# Allegro board EVK_BaseBoard.brd
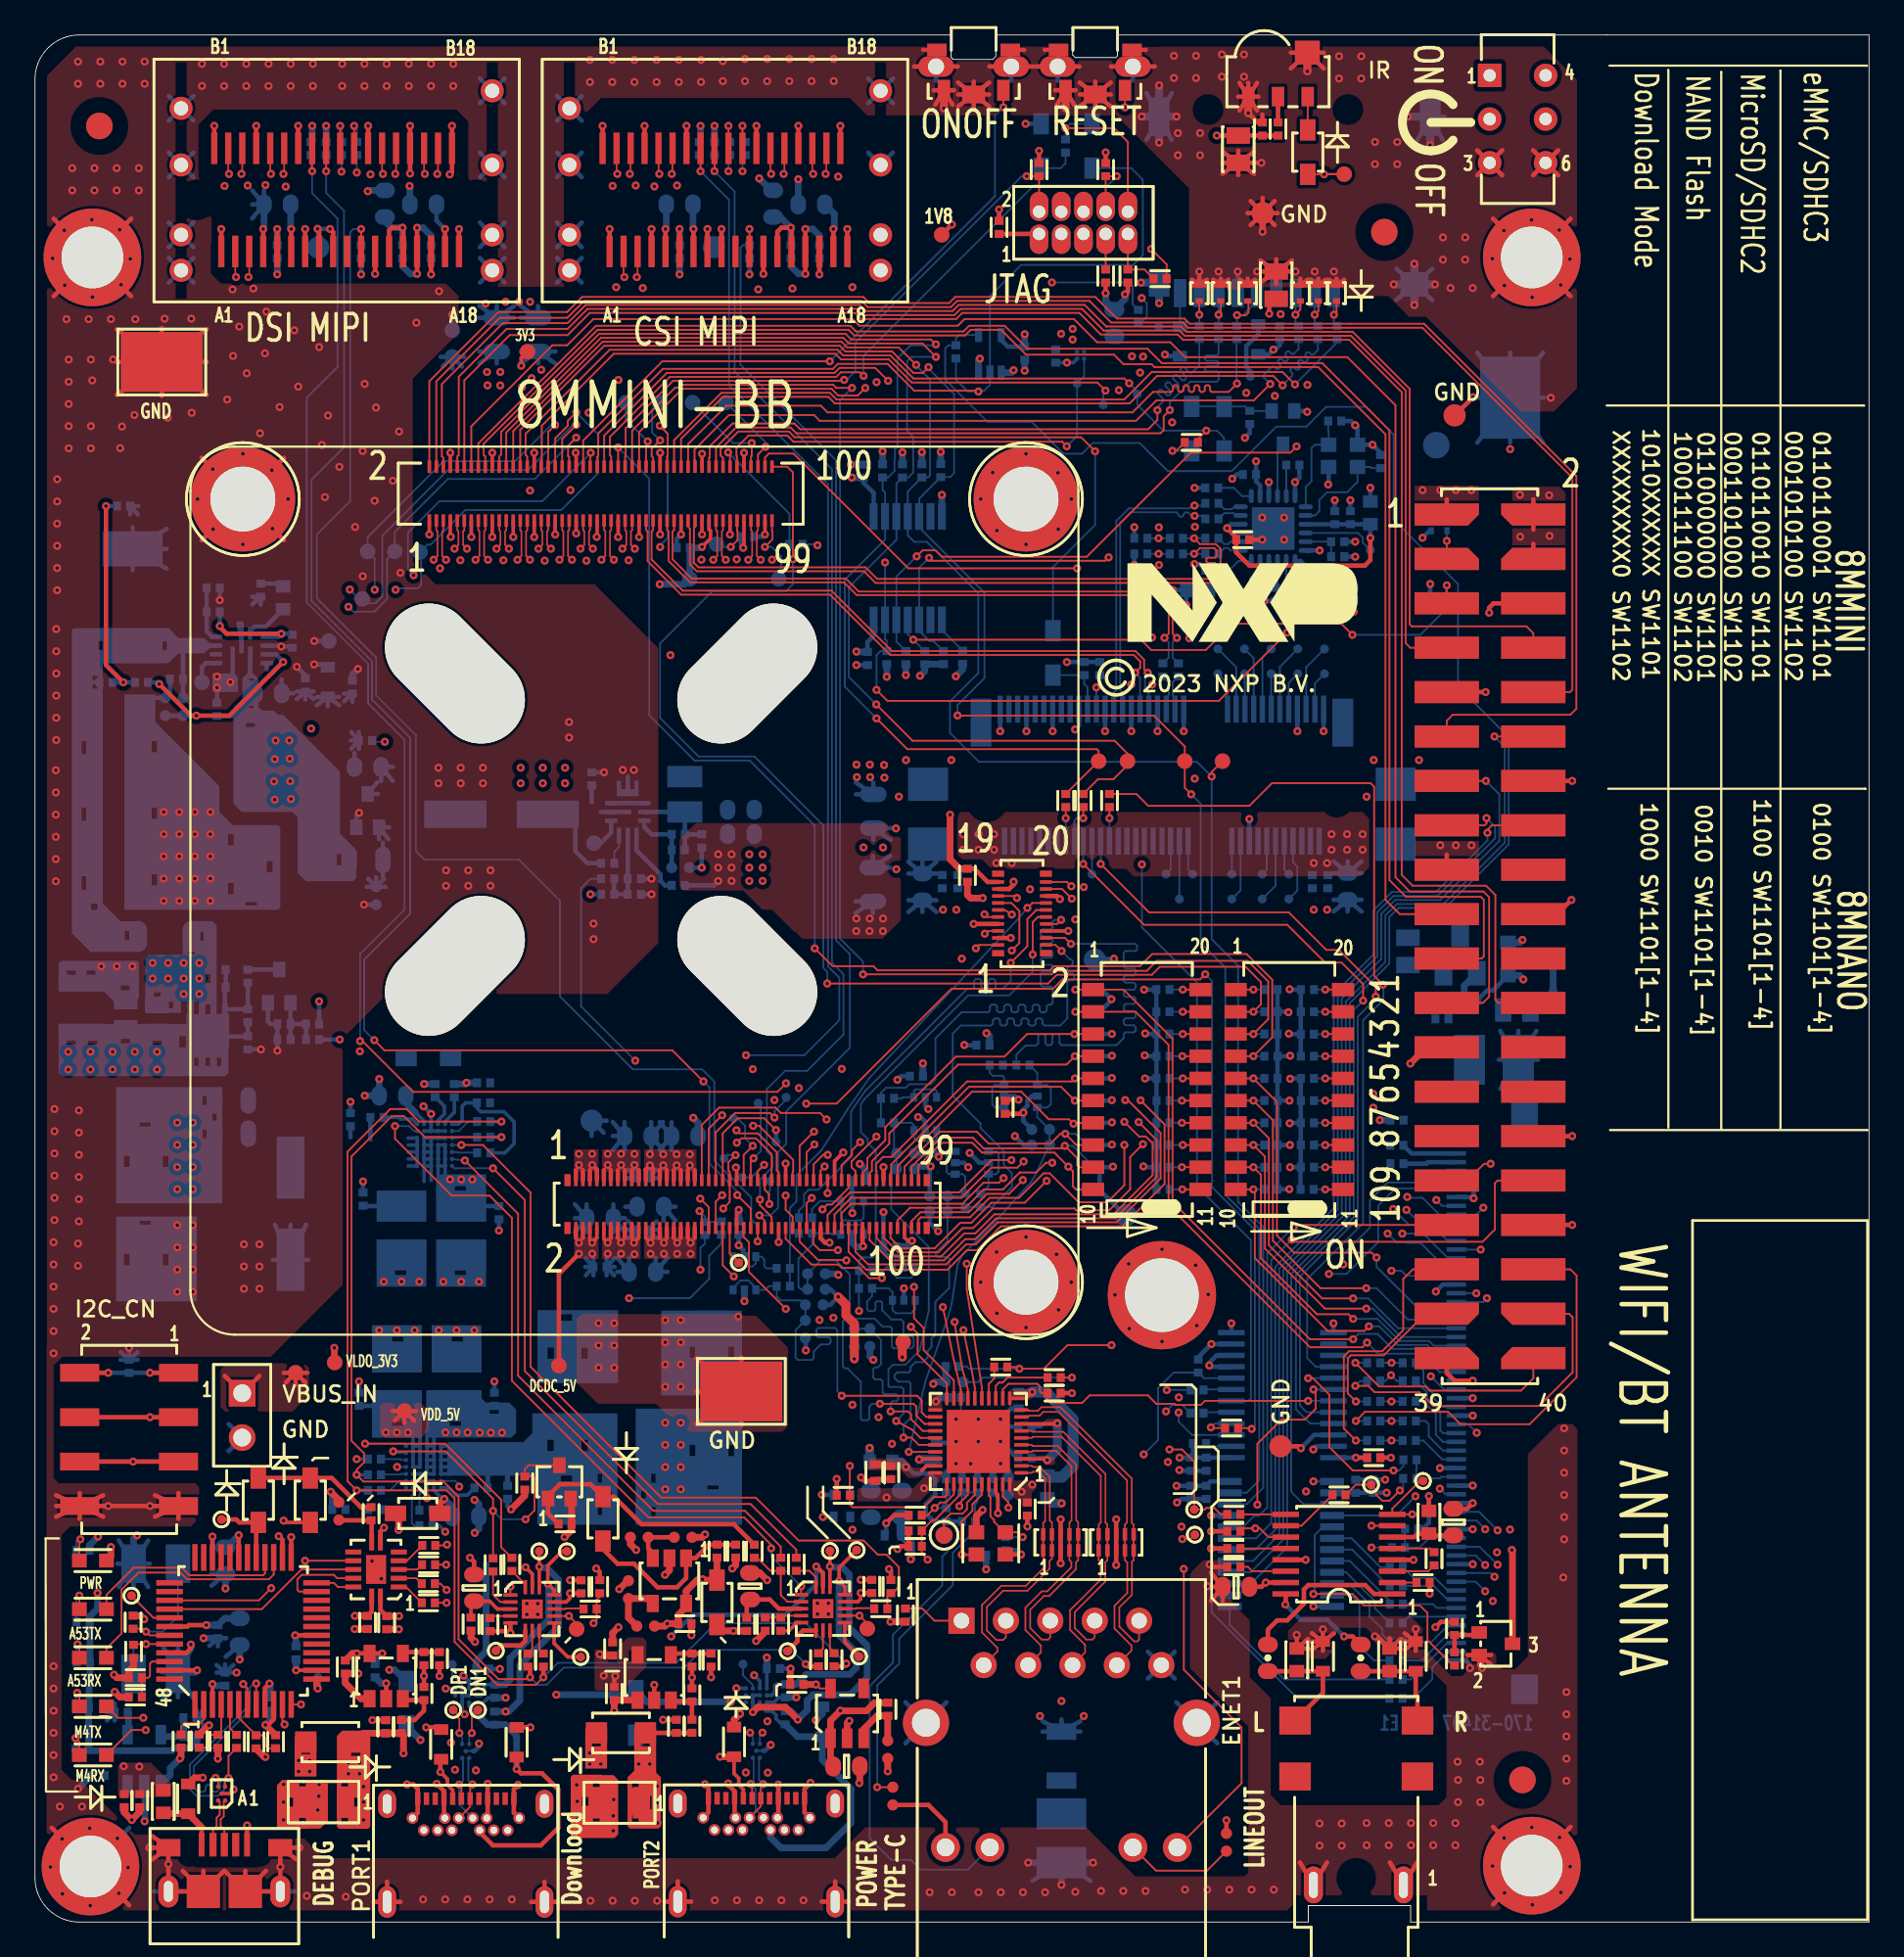
[diagram p0: board, top side]
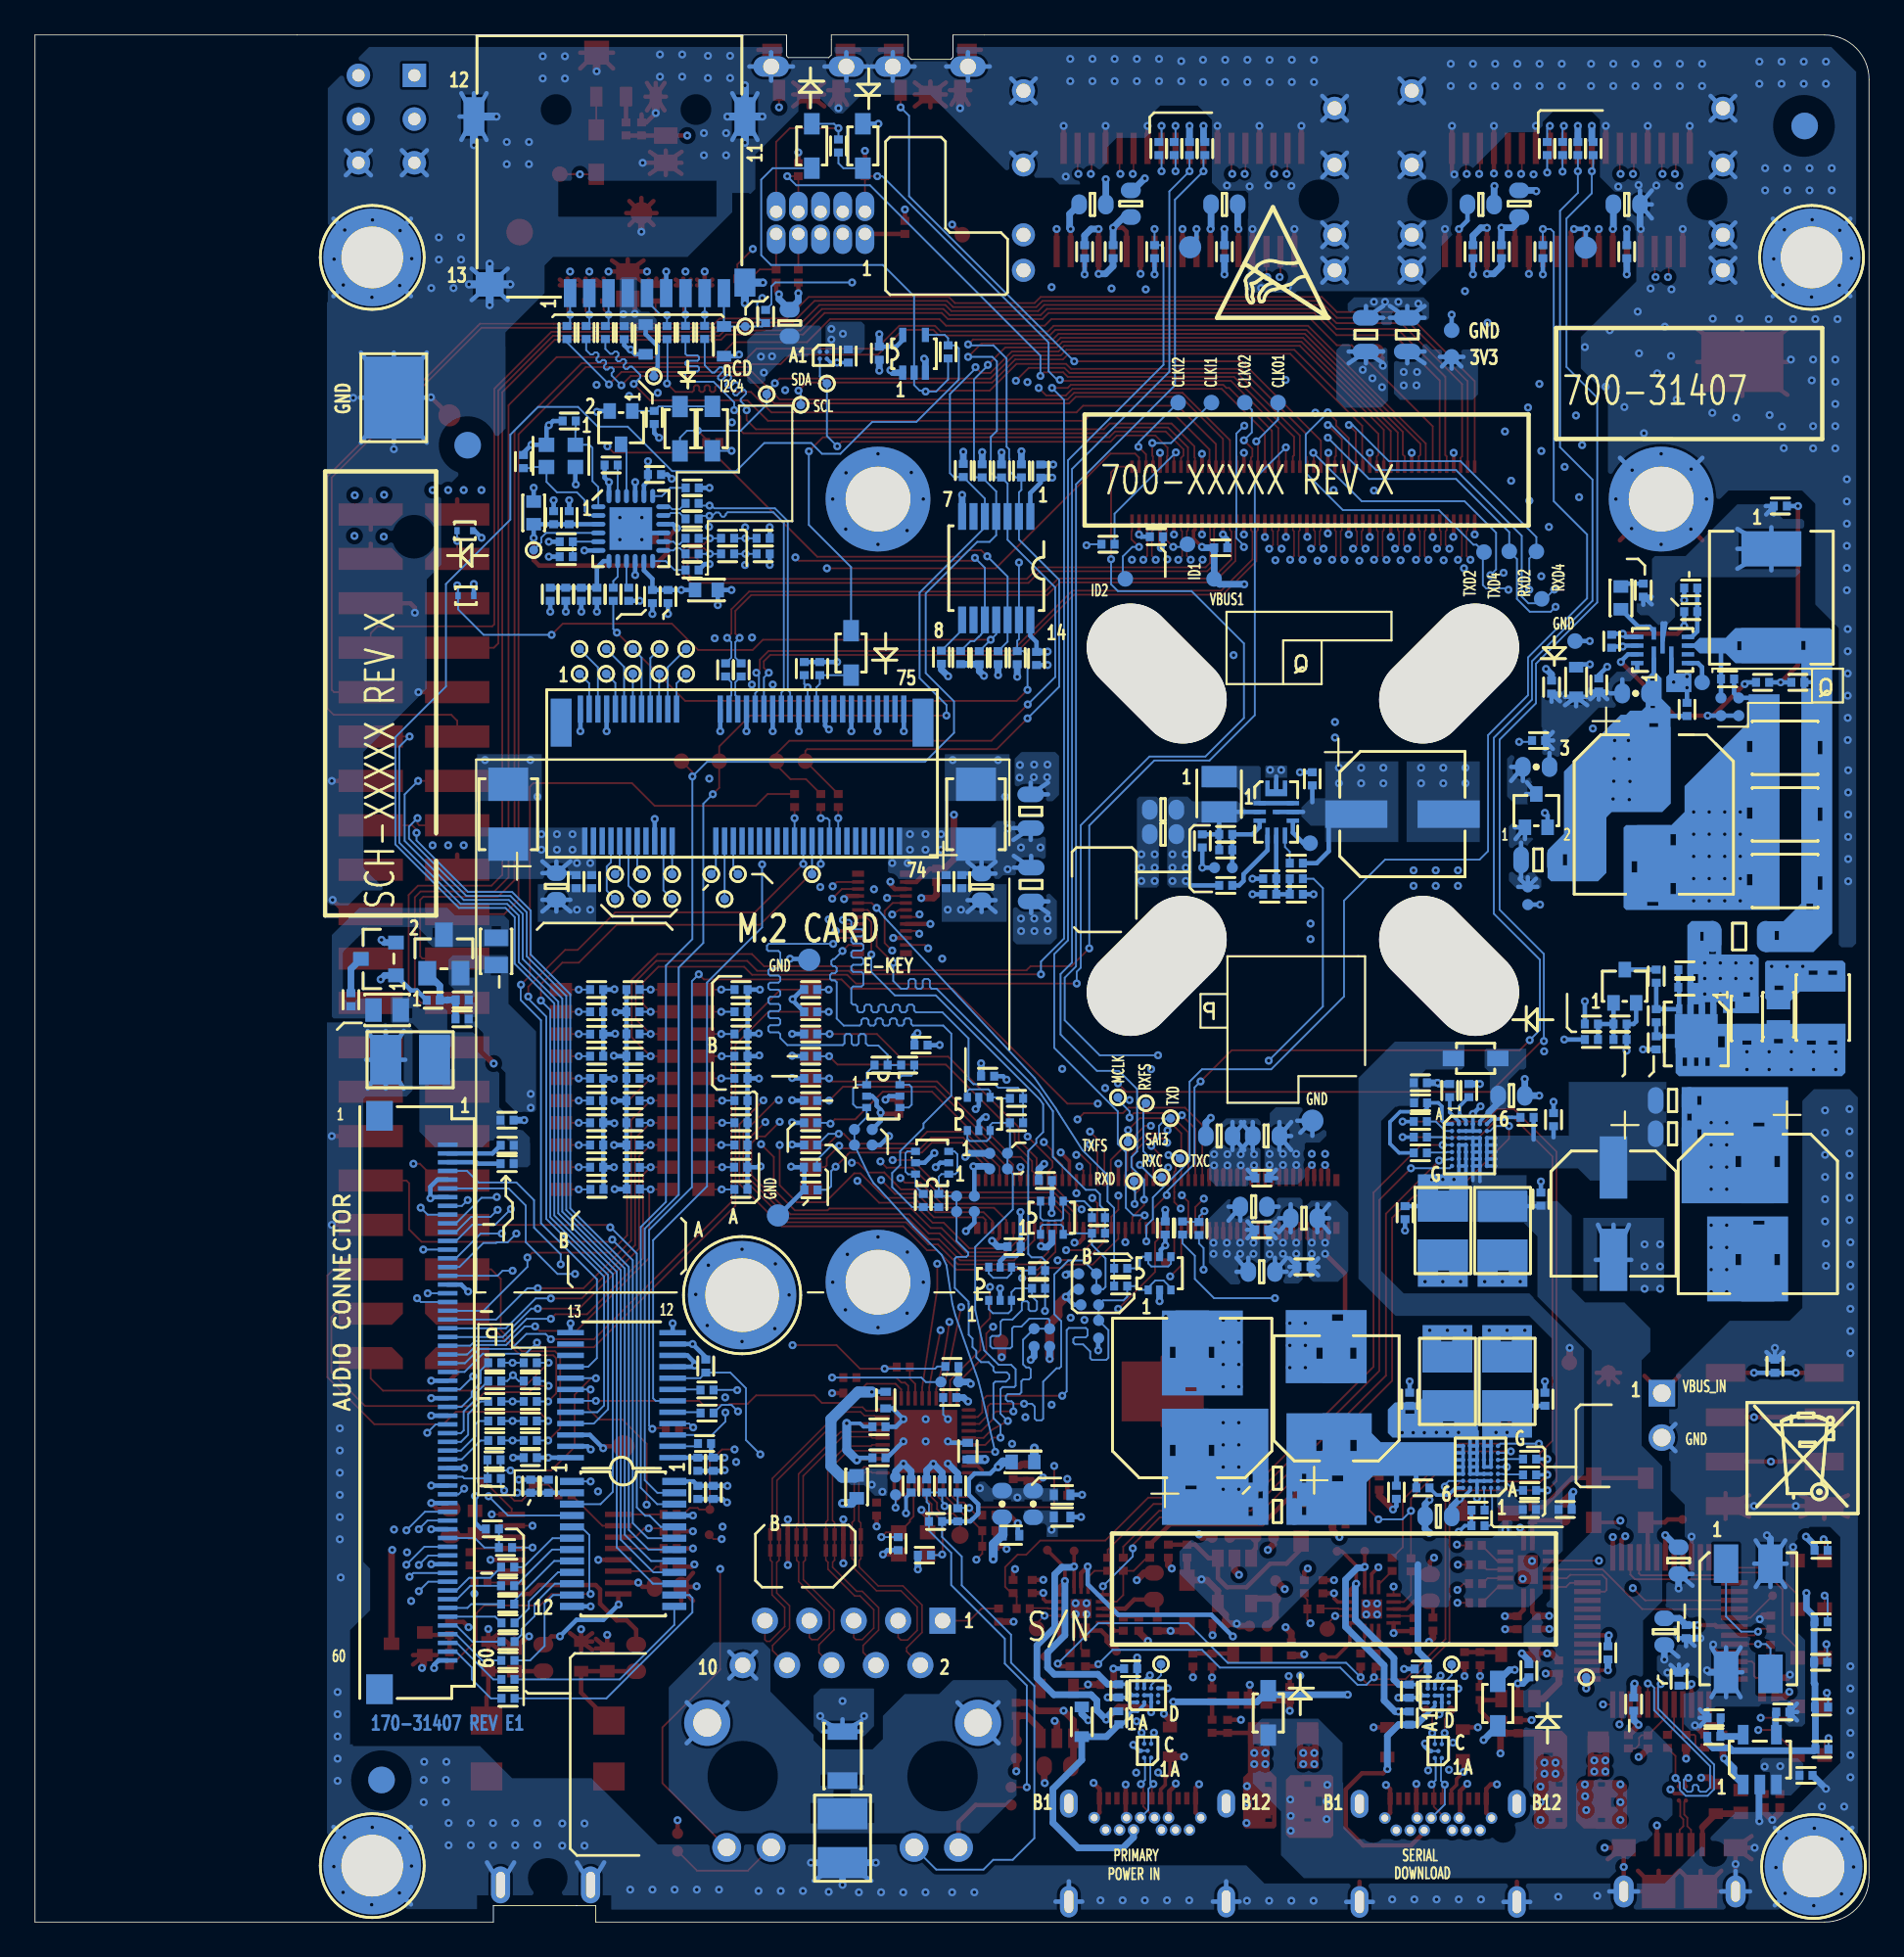
[diagram p1: board, bottom side, seen from below]

Outline 104.92 x 107.95 mm; copper layers: TOP, L2_GND_1, L3_INT_1, L4_PWR_1, L5_PWR_2, L6_INT_2, L7_GND_2, BOTTOM. Coordinates in mm from the lower left corner of the outline.
Outline path: 0,105.41 arc(0.74,107.21) 2.54,107.95 52.4,107.95 52.4,106.68 52.53,106.55 54.79,106.55 54.97,106.73 54.97,107.95 59.36,107.95 59.36,106.81 59.51,106.65 61.82,106.65 61.93,106.76 61.93,107.95 104.92,107.95 104.92,0 78.69,0 78.69,0.94 72.84,0.94 72.84,0 2.54,0 arc(0.74,0.74) 0,2.54 0,105.41

## Design rules (mm)
constraint set DEFAULT: min track width 0.102
net group 3483_EN_SNK1: nets 3483_EN_SNK1 EN_SNK1
net group 3483_EN_SNK2: nets 3483_EN_SNK2 EN_SNK2
net group CLS_DIFF_100: nets PCIE_CLKN PCIE_CLKP
net group CSI_I2C_SCL: nets CSI_I2C_SCL I2C3_SCL
net group CSI_I2C_SDA: nets CSI_I2C_SDA I2C3_SDA
net group DIFFPAIR0: nets USB_DBG_DM USB_DBG_DP
net group ECSPI1: nets UART3_CTS UART3_RTS
net group EN_SRC1: nets EN_SRC1 PD_EN_SRC1
net group EN_SRC2: nets EN_SRC2 PD_EN_SRC2
net group ENET_MDIO: nets ENET_MDIO MDIO
net group ENET_NRST_LV: nets ENET_NRST_LV N107724179
net group ETH_TRX0: nets ETH_TRX0_N ETH_TRX0_P
net group ETH_TRX1: nets ETH_TRX1_N ETH_TRX1_P
net group ETH_TRX2: nets ETH_TRX2_N ETH_TRX2_P
net group ETH_TRX3: nets ETH_TRX3_N ETH_TRX3_P
net group EXP_IO0: nets EXP_IO0 N104271923
net group EXP_IO1: nets EXP_IO1 N104271907
net group EXP_IO2: nets EXP_IO2 N104271909
net group EXP_IO3: nets EXP_IO3 N104271911
net group EXP_IO4: nets EXP_IO4 N104271896
net group EXP_IO5: nets EXP_IO5 N104271904
net group EXP_IO6: nets EXP_IO6 N104271893
net group EXP_IO7: nets EXP_IO7 N104271890
net group EXT_PWREN: nets EXT_PWREN N107626870
net group JTAG_NTRST: nets JTAG_NTRST N106685087
net group LED_LINK1000: nets LED2_CFGLDO1 LED_LINK1000
net group LINE_OUTL: nets LINE_OUTL N102887640
net group LINE_OUTR: nets LINE_OUTR N102887637
net group MDC: nets ENET_MDC MDC
net group N102889416: nets N102889416 N102889418
net group N106947509: nets N106947509 N106947511
net group N107060780: nets N106825388 N107060780
net group NRST: nets N106685043 NRST
net group PCIE_NRST_LV: nets N107724192 PCIE_NRST_LV
net group PCIE_RX: nets PCIE_RXN PCIE_RXP
net group PCIE_TXN: nets N105095143 PCIE_TXN
net group PCIE_TXP: nets N105095140 PCIE_TXP
net group PMIC_ON_REQ: nets N106947532 PMIC_ON_REQ
net group POR_B: nets EX_POR_B POR_B
net group REF_CLK_C: nets N101995404 N101995408
net group SAI2_MCLK: nets N107724212 SAI2_MCLK
net group SAI3_TXC: nets N102889754 SAI3_TXC
net group SAI5: nets SAI5_MCLK SAI5_RXFS
net group SD2_CLK: nets N98831920 SD2_CLK
net group SD2_CMD: nets N101118780 SD2_CMD
net group SD2_DATA0: nets N101118689 SD2_DATA0
net group SD2_DATA1: nets N101118681 SD2_DATA1
net group SD2_DATA3: nets N101118786 SD2_DATA3
net group SPDIF: nets SPDIF_RX SPDIF_TX
net group SPDIF_EXT_CLK: nets N104271750 SPDIF_EXT_CLK
net group UART: nets UART3_RXD UART3_TXD
net group UART2_RXD: nets N108373117 UART2_RXD
net group UART2_TXD: nets N108373115 UART2_TXD
net group UART4_RXD: nets N108373121 UART4_RXD
net group UART4_TXD: nets N108373119 UART4_TXD
net group USB1_CC1: nets USB1_CC1 USB1_CC1_CN
net group USB1_CC2: nets USB1_CC2 USB1_CC2_CN
net group USB1_D: nets USB1_DN USB1_DP
net group USB2_CC1: nets USB2_CC1 USB2_CC1_CN
net group USB2_CC2: nets USB2_CC2 USB2_CC2_CN
net group USB2_D: nets USB2_DN USB2_DP
net group USB_LD_NFLT1: nets LD1_NINT USB_LD_NFLT1
net group USB_LD_NFLT2: nets LD2_NINT USB_LD_NFLT2
net group VBUS_DBG: nets N108201307 VBUS_DBG
net group VBUS_EXT: nets N101800237 N104270741
net group CSI-DSI: nets CSI_CKN CSI_CKP CSI_DN0 CSI_DN1 CSI_DN2 CSI_DN3 CSI_DP0 CSI_DP1 CSI_DP2 CSI_DP3 DSI_CKN DSI_CKP DSI_DN0 DSI_DN1 DSI_DN2 DSI_DN3 DSI_DP0 DSI_DP1 DSI_DP2 DSI_DP3
net group DSI_TS_SCL: nets DSI_TS_SCL I2C2_SCL M2_I2C_SCL
net group DSI_TS_SDA: nets DSI_TS_SDA I2C2_SDA M2_I2C_SDA
net group ECSPI2: nets BT_DEV_WAKE N102026698 PCIE_NCLKREQ PCIE_NRST PCIE_NWAKE
net group ENET: nets N107968412 N107968479 N107968670 N107968707 N107968717 N107968739
net group I2C2_SDA_3V3: nets I2C2_SDA_3V3 LD1_I2C_SDA LD2_I2C_SDA N104279469 PD1_I2C_SDA PD2_I2C_SDA
net group LD1_I2C_SCL: nets I2C2_SCL_3V3 LD1_I2C_SCL LD2_I2C_SCL N104279466 PD1_I2C_SCL PD2_I2C_SCL
net group M-ENET-TX: nets ENET_TD0 ENET_TD1 ENET_TD2 ENET_TD3 ENET_TX_CTL ENET_TXC
net group N103620610: nets N108059802
net group N103621273: nets N103620608 N103620806 N103620818 N103621273 N107870832
net group NCS_CLK: nets ENET_XTLO
net group NCS_POWER_PH: nets ILIM_5V_VBUS1 ILIM_5V_VBUS2 LINEVDD N99468751 N101995244 N101995353 N101995570 N106751784 N106751786 USB1_VBUS USB1_VBUS_IN VCC VCC_3V6 VLDO1_3V3
net group PCIE: nets M2_USB_DN M2_USB_DP N101995436 N101995453 REF_CLKN_CN REF_CLKP_CN
net group SAI1: nets SAI1_MCLK SAI1_RXC SAI1_RXD0 SAI1_RXD1 SAI1_RXD2 SAI1_RXD3 SAI1_RXD4 SAI1_RXD5 SAI1_RXD6 SAI1_TXC SAI1_TXD0 SAI1_TXD1 SAI1_TXD2 SAI1_TXD3 SAI1_TXD4 SAI1_TXD5 SAI1_TXD6
net group SAI2: nets M2_PCM_CLK M2_PCM_IN M2_PCM_OUT M2_PCM_SYNC
net group SAI2_3_MCLK: nets N102889696 SAI2_3_MCLK SAI3_MCLK
net group SAI3: nets SAI3_RXD SAI3_RXFS SAI3_TXD SAI3_TXFS
net group SAI5_RXC: nets N104271082 N106693819 SAI5_RXC
net group SAI5_RXD0: nets N104271107 N106693817 SAI5_RXD0
net group SAI5_RXD1: nets N104271093 N107162937 SAI5_RXD1
net group SAI5_RXD2: nets N104271096 N106693815 SAI5_RXD2
net group SD2: nets M2_SD_CLK M2_SD_CMD M2_SD_DAT0 M2_SD_DAT1 M2_SD_DAT2 M2_SD_DAT3 M2_SD_NRST M2_SD_WAKE SD2_NRST
net group VCC_3V3_FT: nets N108242066 N108242068 N108243403 N108243405

## Placement (name value [footprint] x y rotation side)
BH1201  .635" LONG  [SPACER_139T]  3.29 95.22 180 bottom
BH1202  .635" LONG  [SPACER_139T]  85.62 95.22 180 bottom
BH1203  .635" LONG  [SPACER_139T]  3.17 3.17 180 bottom
BH1204  .635" LONG  [SPACER_139T]  85.62 3.23 180 bottom
BH1206  SMTSO-M25  [MH244-166T]  64.47 35.86 180 bottom
BH1207  STANDOFF M2.5  [STANDOFF_CIRCLE_5P1-2P5MM_NSP]  56.69 81.4 45 top
BH1208  STANDOFF M2.5  [STANDOFF_CIRCLE_5P1-2P5MM_NSP]  56.69 36.6 45 top
BH1209  STANDOFF M2.5  [STANDOFF_CIRCLE_5P1-2P5MM_NSP]  11.89 81.4 45 top
C101  100uF  [CCE8P3X8P3]  12.31 63.36 270 bottom
C102  0.22uF  [0402_CC]  12.91 76.19 270 bottom
C103  47UF  [CASE_D_AL]  26.69 63.38 180 bottom
C105  0.1uF  [0402_CC]  10.41 69.37 90 bottom
C106  0.1uF  [0402_CC]  8.09 71.11 180 bottom
C107  100UF  [1210_CC]  4.8 67.17 0 bottom
C108  100UF  [1210_CC]  4.8 63.36 0 bottom
C109  100UF  [1210_CC]  4.8 59.55 0 bottom
C113  0.22uF  [0402_CC]  15.46 70.76 90 bottom
C114  1uF  [0402_CC]  14.72 73.27 270 bottom
C116  0.1uF  [0402_CC]  31.85 65.4 90 bottom
C117  0.1uF  [0402_CC]  34.28 59.68 0 bottom
C118  1000pF  [0402_CC]  36.8 61.33 180 bottom
C119  22uF  [CC0603_OV]  40.38 63.63 0 bottom
C120  22uF  [CC0603_OV]  40.38 62.23 0 bottom
C121  0.1uF  [0402_CC]  38.14 61.85 270 bottom
C122  1000pF  [0402_CC]  36.8 59.3 0 bottom
C138  0.22uF  [0402_CC]  10.54 53.47 0 bottom
C141  1uF  [0402_CC]  12.17 50.29 270 bottom
C142  10uF  [0805_CC]  5.18 51.9 90 bottom
C145  0.1uF  [0402_CC]  14.24 51.37 180 bottom
C157  100UF  [1210_CC]  2.65 52.31 90 bottom
C159  0.01UF  [0402_CC]  12.17 51.85 90 bottom
C160  220PF  [0402_CC]  4.07 70.92 180 bottom
C161  0.22uF  [0402_CC]  18.16 70.64 90 bottom
C201  1uF  [0402_CC]  75.54 24.93 90 bottom
C202  1uF  [0402_CC]  67 24.58 270 bottom
C203  0.01UF  [0402_CC]  66.11 24.58 270 bottom
C204  0.01UF  [0402_CC]  76.56 24.93 90 bottom
C205  1uF  [0402_CC]  67 26.19 270 bottom
C206  0.01UF  [0402_CC]  66.11 26.19 270 bottom
C207  1uF  [0402_CC]  76.58 26.56 0 top
C208  0.01UF  [0402_CC]  76.58 26.56 0 bottom
C209  0.1uF  [0402_CC]  32.32 37.48 0 bottom
C210  22uF  [CC0603_OV]  32.32 40.26 0 bottom
C211  0.1uF  [0402_CC]  34.73 42.56 180 bottom
C212  22uF  [CC0603_OV]  37.17 44.96 0 bottom
C213  0.1uF  [0402_CC]  34.75 39.6 180 bottom
C214  22uF  [CC0603_OV]  35.21 40.92 180 bottom
C215  0.1uF  [0402_CC]  37.08 78.61 180 bottom
C216  0.1uF  [0402_CC]  40.77 79.25 0 bottom
C217  22uF  [CC0603_OV]  34.49 44.96 180 bottom
C218  22uF  [CC0603_OV]  34.75 37.2 180 bottom
C219  0.1uF  [0402_CC]  47.39 83 90 bottom
C220  0.1uF  [0402_CC]  47.62 72.28 270 bottom
C221  0.1uF  [0402_CC]  56.62 89.75 270 bottom
C301  4.7uF  [CC1210]  24.12 30.93 90 bottom
C302  0.1uF  [0402_CC]  26.28 29.91 90 bottom
C303  0.01UF  [0402_CC]  20.07 11.18 90 top
C304  100uF  [CCE8P3X8P3]  38.72 29.98 90 bottom
C305  100uF  [CCE8P3X8P3]  6.36 40.51 270 bottom
C308  0.1uF  [0402_CC]  27.04 24.58 270 bottom
C309  47UF  [CASE_D_AL]  30.47 29.96 90 bottom
C311  47UF  [CC1210]  20.7 30.93 90 bottom
C313  0.1uF  [0402_CC]  18.54 29.91 90 bottom
C314  0.1uF  [0402_CC]  17.39 23.6 180 bottom
C315  0.01UF  [0402_CC]  25.52 24.84 0 bottom
C316  1000pF  [0402_CC]  22.37 23.56 0 bottom
C317  4.7uF  [CC0603_OV]  24.63 23.21 0 bottom
C318  2.2uF  [0402_CC]  26.04 17.02 90 top
C319  4.7uF  [CC0603_OV]  25.12 19.12 90 top
C320  0.1uF  [0402_CC]  31.24 19.18 270 top
C321  4.7uF  [CC1210]  20.97 39.56 270 bottom
C322  0.1uF  [0402_CC]  18.77 41.35 90 bottom
C323  0.01UF  [0402_CC]  36.69 11.2 90 top
C325  0.1uF  [0402_CC]  18.05 45.9 90 bottom
C326  47UF  [CASE_D_AL]  14.62 40.52 270 bottom
C327  47UF  [CC1210]  24.38 39.56 270 bottom
C329  0.1uF  [0402_CC]  26.54 40.58 270 bottom
C330  0.01UF  [0402_CC]  19.56 46.03 180 bottom
C331  0.1uF  [0402_CC]  25.67 48.01 180 bottom
C332  2.2uF  [0402_CC]  41.77 17.04 90 top
C333  1000pF  [0402_CC]  22.89 47.56 90 bottom
C334  4.7uF  [CC0603_OV]  20.45 47.27 180 bottom
C335  4.7uF  [CC0603_OV]  40.91 19.21 90 top
C336  0.1uF  [0402_CC]  47.87 19.2 270 top
C337  0.1uF  [0402_CC]  25.61 14.48 0 bottom
C338  0.1uF  [0402_CC]  42.24 14.5 0 bottom
C339  1uF  [CC0603_OV]  46.42 8.9 0 top
C340  2.2uF  [0402_CC]  43.58 13.59 180 top
C341  18PF  [0402_CC]  40.08 21.22 270 top
C342  0.1uF  [0402_CC]  19.46 14.38 270 bottom
C343  0.1uF  [0402_CC]  33.05 15.63 90 top
C344  0.1uF  [0402_CC]  37.18 17.07 0 top
C401  1uF  [0402_CC]  79.41 19.42 0 top
C402  4.7uF  [CC0603_OV]  81.14 22.87 90 top
C403  4.7uF  [CC0603_OV]  68.71 19.18 180 top
C404  2.2uF  [0402_CC]  68.58 20.32 0 top
C405  1uF  [0402_CC]  80.03 20.78 270 top
C406  2700pF  [0603_CC]  77.49 15 270 top
C407  2700pF  [0603_CC]  72.18 15 90 top
C503  0.22uF  [0402_CC]  48.96 25.71 270 top
C507  0.22uF  [0402_CC]  52.59 30 0 bottom
C514  470PF  [0402_CC]  50.35 22.38 180 top
C515  470PF  [0402_CC]  53.91 24.95 90 bottom
C516  470PF  [0402_CC]  52.13 24.95 90 bottom
C517  1000pf  [CC1210]  58.72 4.79 90 bottom
C518  22PF  [0402_CC]  54.04 20.99 0 bottom
C519  22PF  [0402_CC]  55.53 21.65 270 bottom
C520  0.22uF  [0402_CC]  50.42 48.39 0 bottom
C521  0.22uF  [0402_CC]  47.12 42.42 0 bottom
C522  0.22uF  [0402_CC]  48.9 38.64 0 bottom
C525  0.22uF  [0402_CC]  54.23 50.16 0 bottom
C526  0.22uF  [0402_CC]  40.26 39.7 90 bottom
C527  0.22uF  [0402_CC]  55.5 46.61 270 top
C603  1uF  [0402_CC]  73.66 75.95 270 bottom
C604  0.01UF  [0402_CC]  72.77 75.95 270 bottom
C605  1uF  [0402_CC]  74.36 80.34 90 bottom
C606  0.01UF  [0402_CC]  75.25 80.34 90 bottom
C607  0.01UF  [0402_CC]  69.09 79.08 0 top
C608  1uF  [0402_CC]  68.71 75.83 270 bottom
C609  0.01UF  [0402_CC]  69.48 82.8 180 bottom
C611  0.01UF  [0402_CC]  69.6 75.83 270 bottom
C613  18PF  [0402_CC]  74.35 85.87 0 bottom
C614  18PF  [0402_CC]  76.97 83.55 90 bottom
C615  0.1uF  [0402_CC]  65.41 71.63 270 bottom
C616  0.1uF  [0402_CC]  64.52 71.63 270 bottom
C617  0.1uF  [0402_CC]  73.96 59.52 270 bottom
C618  10uF  [CC0603_OV]  50.77 59.22 270 bottom
C620  0.1uF  [0402_CC]  73.07 59.52 270 bottom
C621  0.1uF  [0402_CC]  52.79 59.52 270 bottom
C622  0.1uF  [0402_CC]  51.9 59.52 270 bottom
C623  10uF  [CC0603_OV]  75.09 59.24 270 bottom
C624  220uF  [CC3528-21]  77.84 63.37 90 bottom
C625  220uF  [CC3528-21]  51.09 63.37 90 bottom
C702  1uF  [0402_CC]  58.39 89.58 270 bottom
C703  47uF  [0805_CC]  71.01 93.64 90 top
C704  0.1uF  [0402_CC]  71.21 90.92 270 bottom
C706  47uF  [0805_CC]  68.83 101.42 270 top
C707  0.1uF  [0402_CC]  70.22 102.57 90 top
C708  22uF  [CC0603_OV]  61.75 91.47 90 bottom
C801  22uF  [CC0603_OV]  13.86 98.26 180 bottom
C802  0.1uF  [0402_CC]  13.86 95.55 270 bottom
C803  0.1uF  [0402_CC]  21.03 95.55 270 bottom
C804  0.1uF  [0402_CC]  22.66 95.55 90 bottom
C805  0.1uF  [0402_CC]  36.87 95.55 270 bottom
C806  0.1uF  [0402_CC]  43.24 95.55 270 bottom
C807  0.1uF  [0402_CC]  44.87 95.55 90 bottom
C811  22uF  [CC0603_OV]  42.23 98.3 90 bottom
C812  22uF  [CC0603_OV]  22.21 98.26 180 bottom
C813  22uF  [CC0603_OV]  36.88 98.26 0 bottom
C814  22uF  [CC0603_OV]  20.02 98.3 90 bottom
C815  22uF  [CC0603_OV]  44.42 98.26 180 bottom
C901  1uF  [0402_CC]  5.99 6.94 270 top
C902  0.1uF  [0402_CC]  5.74 13.98 180 top
C903  0.1uF  [0402_CC]  5.11 6.94 270 top
C905  1uF  [0402_CC]  3.61 8.39 180 bottom
C906  10uF  [CC0603_OV]  10.9 20.68 270 bottom
C907  27 PF  [0402_CC]  5.61 17.15 90 top
C908  27 PF  [0402_CC]  5.64 15.48 270 top
C909  0.1uF  [0402_CC]  9.4 10.35 90 top
C910  0.1uF  [0402_CC]  10.46 16.61 270 bottom
C911  0.1uF  [0402_CC]  10.87 13.89 90 bottom
C912  10uF  [CC0603_OV]  11.71 16.61 270 bottom
C913  0.1uF  [0402_CC]  14.94 15.4 90 bottom
C914  0.1uF  [0402_CC]  13.46 12.46 90 bottom
C915  0.1uF  [0402_CC]  19.02 17.14 270 top
C916  0.1uF  [0402_CC]  20.12 17.13 270 top
C917  0.22uF  [0402_CC]  4.93 12.01 180 bottom
C918  1uF  [0402_CC]  8.86 11.68 0 bottom
C920  0.033uF  [0402_CC]  12.65 10.31 90 top
C1001  10UF  [CC1210]  83.45 49.33 0 bottom
C1002  0.1uF  [0402_CC]  77.91 45.87 180 bottom
C1003  0.1uF  [0402_CC]  5.38 31.79 90 bottom
C1004  0.22uF  [0402_CC]  80.47 52.76 0 bottom
C1005  4.7uF  [CC0402_TOL0P15]  46.16 24.44 180 bottom
C1006  4.7uF  [CC0402_TOL0P15]  46.16 23.17 180 bottom
C1007  4.7uF  [CC0402_TOL0P15]  49.08 22.13 180 bottom
C1008  0.22uF  [0402_CC]  56.63 28.33 180 bottom
C1009  0.22uF  [0402_CC]  56.63 26.55 180 bottom
C1010  0.22uF  [0402_CC]  54.8 24.95 90 bottom
C1011  4.7uF  [CC0402_TOL0P15]  48.07 25.71 270 top
C1012  4.7uF  [CC0402_TOL0P15]  56.25 29.86 270 bottom
C1013  0.22uF  [0402_CC]  56.77 23.62 270 top
C1014  4.7uF  [CC0402_TOL0P15]  51.55 26.94 90 bottom
C1015  0.22uF  [0402_CC]  49.79 17.56 270 top
D101  BZX585-B2V4  [SOD523]  16.76 70.93 90 bottom
D301  PTVS20VS1UR  [SOD123W]  16.89 10.29 180 top
D303  PTVS20VS1UR  [SOD123W]  33.52 10.82 180 top
D308  NSR0320  [SOD323]  34.37 11.96 0 bottom
D309  NSR0320  [SOD323]  21.24 12.5 0 bottom
D310  NSR0320  [SOD323]  39.01 18.29 180 top
D311  NSR0320  [SOD323]  32.49 23.06 0 top
D312  NSR0320  [SOD323]  21.89 23.38 270 top
D313  NSR0320  [SOD323]  22.5 49.4 270 bottom
D601  NSR0320  [SOD323]  58.23 72.6 180 bottom
D602  NSR0320  [SOD323]  66.17 85.43 180 bottom
D603  NSR0320  [SOD323]  68.02 85.43 180 bottom
D702  ESD9L5.0ST5G  [SOD-923]  73.42 93.18 270 top
D703  ESD9L5.0ST5G  [SOD-923]  74.46 93.18 270 top
D704  ESD9L5.0ST5G  [SOD-923]  66.61 93.18 270 top
D705  ESD9L5.0ST5G  [SOD-923]  67.83 93.18 270 top
D706  ESD9L5.0ST5G  [SOD-923]  69.37 93.18 270 top
D707  ESD9L5.0ST5G  [SOD-923]  72.38 93.18 270 top
D708  LED RED  [LED_0603]  3.31 20.68 0 top
D709  NSR0320  [SOD323]  72.81 101.25 180 top
D902  LED GREEN  [LED_0603]  3.31 12.34 0 top
D903  LED_ORANGE  [LED_0603_11MIL]  3.31 9.56 0 top
D905  LED_ORANGE  [LED_0603_11MIL]  3.31 15.12 0 top
D906  LED GREEN  [LED_0603]  3.31 17.9 0 top
D907  NSR0320  [SOD323]  57.56 101.6 180 bottom
D908  NSR0320  [SOD323]  60.48 101.6 0 bottom
D909  NSR0320  [SOD323]  15.75 24.13 180 top
D910  NSR0320  [SOD323]  12.77 24.13 180 top
D1001  ESD9L5.0ST5G  [SOD-923]  80.26 75.88 0 bottom
D1002  ESD9L5.0ST5G  [SOD-923]  80.32 79.59 0 bottom
F301  7A  [FUSE_3P4X1P8]  16.51 6.86 180 top
F302  7A  [FUSE_3P4X1P8]  33.44 6.83 180 top
J101  HDR 1X2 TH  [HDR102_338H]  11.85 30.25 0 top
J201  DF40C-100DS-0.4V(51)  [CON100_0P4_22P8X3P1_SM]  32.36 81.71 0 top
J202  DF40C-100DP-0.4V(51)  [CON100_0P4_21P7X2P05_SM]  40.74 41.07 180 top
J203  DF40C-20DP-0.4V(51)  [CON20_0P4_5P7X2P05_SM]  56.46 57.7 270 top
J301  23K20101#LCP-582RF  [CON24_USB_TYPEC_RA_SMT_TH]  27.7 5.95 0 top
J302  23K20101#LCP-582RF  [CON24_USB_TYPEC_RA_SMT_TH]  44.32 5.97 0 top
J401  KJ366EYS  [CON6_AUDIOJACK_RA_TH]  78.28 2.13 90 top
J501  RJ-45  [CON_RJ45_10_2LED_TH]  53 17.24 180 top
J601  CON_MINI CARD_RA  [CON_75_0P5_22X9_RA]  64.47 65.79 180 bottom
J701  CONN_SD_CARD 9  [CON9_SDCARD_1P1MM]  72.06 100.43 0 bottom
J801  IPASS MINISAS  [CON_36_0P8_TH]  17.26 98.52 0 top
J802  IPASS MINISAS  [CON_36_0P8_TH]  39.47 98.52 0 top
J901  MICRO_USB_TYPEB  [CON_USB_TYPE_B_SM]  10.83 1.75 0 top
J902  HDR 2X5  [CON_2RH_10_50]  57.44 96.57 0 top
J1001  XF2M-6015-1AH  [CON_FPC_60F_0P5_SM_RA]  83.06 29.72 270 bottom
J1003  TSM-120-01-F-DV-A  [HDR220_TSM_A_SM]  83.24 56.39 0 top
J1004  SSM-104-L-DV  [CON_2X4_SKT_100_SM]  5.38 27.61 0 top
L101  1.5uH  [IND_IHLP]  5.59 75.76 270 bottom
L102  0.47uH  [IND_SPH2520]  37.17 64.51 270 bottom
L401  120 OHM  [0603_CC]  79.74 22.87 90 top
L501  120 OHM  [0603_CC]  48.4 26.32 0 bottom
L601  120 OHM  [0603_CC]  76.39 80.61 90 bottom
L602  120 OHM  [0603_CC]  66.51 76.2 0 bottom
L901  120 OHM  [0603_CC]  7.34 6.9 90 top
L904  120 OHM  [0603_CC]  57.91 24.89 90 bottom
NOREF  -  []  32.38 62.81 0 top
NOREF#2  -  []  10.26 73.82 0 top
NOREF#3  -  []  13.31 26.25 90 top
NOREF#4  -  []  21.6 5.95 0 top
NOREF#5  -  [unnamed#2]  85.09 8.13 0 top
NOREF#6  -  []  64.66 122.33 0 top
NOREF#7  -  []  58.95 104.79 0 top
NOREF#8  -  []  40.86 10.41 90 top
NOREF#9  -  []  44.88 12.81 0 top
NOREF#10  -  []  -170.47 -197.96 0 top
NOREF#11  -  []  46.33 17.13 90 top
NOREF#12  -  []  61.85 71.16 0 top
NOREF#13  -  []  60.22 89.23 0 top
NOREF#14  -  []  74.47 64.11 90 top
NOREF#15  -  []  41.07 10.2 0 top
NOREF#16  -  []  48.37 94.49 90 top
NOREF#17  -  []  7.63 1.75 0 top
NOREF#18  -  []  59.62 82.25 0 top
NOREF#19  -  []  45.59 22.85 0 top
NOREF#20  -  []  31.47 98.52 0 top
NOREF#21  -  []  51.23 26.36 90 top
NOREF#22  -  []  31.47 98.52 0 top
NOREF#23  -  []  47.89 24.12 90 top
NOREF#24  -  []  48.37 96.52 90 top
NOREF#25  -  []  32.96 63 0 top
NOREF#26  -  [unnamed#2]  24.02 54.7 315 top
NOREF#27  -  []  73.64 13.39 90 top
NOREF#28  -  []  8.36 94.49 0 top
NOREF#29  -  []  30.47 42.44 0 top
NOREF#30  -  []  52 104.79 90 top
NOREF#31  -  []  14.84 52.45 90 top
NOREF#32  -  []  10.66 95.57 0 top
NOREF#33  -  []  89.92 0 0 top
NOREF#34  -  []  9.63 1.75 0 top
NOREF#35  -  []  20.96 27.5 0 top
NOREF#36  -  []  48.61 22.13 0 top
NOREF#37  -  []  72.23 -0.12 0 top
NOREF#38  -  []  24.26 95.57 90 top
NOREF#39  -  []  14.82 82.25 0 top
NOREF#40  -  [unnamed#2]  24.02 71.42 45 top
NOREF#41  -  []  54.8 105.6 0 top
NOREF#42  -  []  81.26 46.47 0 top
NOREF#43  -  []  49.01 22.95 0 top
NOREF#44  -  []  39.74 42.44 0 top
NOREF#45  -  []  3.17 3.17 0 top
NOREF#46  -  []  34.96 61.95 90 top
NOREF#47  -  []  13.26 73.02 90 top
NOREF#48  -  []  11.31 72.22 90 top
NOREF#49  -  []  48.07 25.24 90 top
NOREF#50  -  []  29.32 7.97 0 top
NOREF#51  -  []  11.85 27.71 90 top
NOREF#52  -  []  46.47 95.57 0 top
NOREF#53  -  []  7.27 10.17 0 top
NOREF#54  -  []  64.97 61.84 0 top
NOREF#55  -  []  14.91 -1.07 90 top
NOREF#56  -  []  31.47 98.52 0 top
NOREF#57  -  []  61.02 89.23 90 top
NOREF#58  -  []  54.47 64.11 0 top
NOREF#59  -  []  23.22 26.84 90 top
NOREF#60  -  []  14.16 12.45 0 top
NOREF#61  -  []  55.1 55.9 90 top
NOREF#62  -  []  34.41 62.15 90 top
NOREF#63  -  []  33.41 62.15 0 top
NOREF#64  -  []  24.26 95.57 0 top
NOREF#65  -  []  29.8 16.56 90 top
NOREF#66  -  []  24.44 13.35 0 top
NOREF#67  -  []  83.21 100.64 0 top
NOREF#68  -  []  48.89 25.64 90 top
NOREF#69  -  []  43.83 17.13 0 top
NOREF#70  -  []  46.74 24.12 0 top
NOREF#71  -  []  51.6 38 0 top
NOREF#72  -  []  40.42 12.32 0 top
NOREF#73  -  []  78.14 18.49 0 top
NOREF#74  -  []  61.75 105.6 0 top
NOREF#75  -  []  10.48 7.75 0 top
NOREF#76  -  []  73.32 38 90 top
NOREF#77  -  []  9.63 50.29 0 top
NOREF#78  -  []  59.62 89.43 90 top
NOREF#79  -  []  38.22 5.97 0 top
NOREF#80  -  []  85.21 13.32 90 top
NOREF#81  -  []  70.13 -1.07 0 top
NOREF#82  -  []  -388.87 209.3 0 top
NOREF#83  -  []  64.66 121.48 0 top
NOREF#84  -  []  68.68 41.91 0 top
NOREF#85  -  []  25.26 98.52 90 top
NOREF#86  -  []  62.51 73.23 0 top
NOREF#87  -  []  55.93 31.58 0 top
NOREF#88  -  []  54.12 68.61 0 top
NOREF#89  -  []  45.69 24.44 0 top
NOREF#90  -  []  50.58 27.51 0 top
NOREF#91  -  []  20.15 1.15 90 top
NOREF#92  -  []  10.66 95.57 0 top
NOREF#93  -  []  3.17 3.17 0 top
NOREF#94  -  []  72.08 11.53 0 top
NOREF#95  -  []  72.08 8.33 0 top
NOREF#96  -  []  9.63 50.29 0 top
NOREF#97  -  []  30.57 94.49 0 top
NOREF#98  -  []  22.42 13.15 90 top
NOREF#99  -  []  64.31 103.28 0 top
NOREF#100  -  []  23.36 80.17 0 top
NOREF#101  -  []  32.87 95.57 0 top
NOREF#102  -  []  65.51 93.18 0 top
NOREF#103  -  []  30.94 42.44 0 top
NOREF#104  -  []  27.2 17.11 0 top
NOREF#105  -  []  24.23 10.39 0 top
NOREF#106  -  []  75.37 54.69 90 top
NOREF#107  -  []  83.53 54.69 90 top
NOREF#108  -  []  21.9 7.06 0 top
NOREF#109  -  []  11.09 7.96 0 top
NOREF#110  -  []  60.53 41.91 0 top
NOREF#111  -  []  75.58 9.53 0 top
NOREF#112  -  []  22.25 5.25 0 top
NOREF#113  -  []  9.26 98.52 0 top
NOREF#114  -  []  32.12 7.97 90 top
NOREF#115  -  []  60.97 106.9 90 top
NOREF#116  -  []  51.6 107.1 0 top
NOREF#117  -  []  8.89 33.6 0 top
NOREF#118  -  []  9.53 4.43 0 top
NOREF#119  -  []  58.95 104.79 90 top
NOREF#120  -  []  71.55 23.32 0 top
NOREF#121  -  []  45.59 22.85 90 top
NOREF#122  -  []  46.43 16.58 90 top
NOREF#123  -  []  71.55 22.67 90 top
NOREF#124  -  []  46.47 95.57 90 top
NOREF#125  -  []  9.26 98.52 0 top
NOREF#126  -  []  25.09 12.3 90 top
NOREF#127  -  []  57 105.6 90 top
NOREF#128  -  []  58.55 107.1 0 top
NOREF#129  -  []  51.02 39.7 90 top
NOREF#130  -  []  34.96 61.95 0 top
NOREF#131  -  []  20.92 5.25 0 top
NOREF#132  -  []  75.58 2.53 0 top
NOREF#133  -  []  24.64 9.78 90 top
NOREF#134  -  []  21.86 43.25 90 top
NOREF#135  -  []  22.56 80.17 0 top
NOREF#136  -  []  46.33 17.13 90 top
NOREF#137  -  []  56.58 30.43 90 top
NOREF#138  -  []  37.55 5.27 0 top
NOREF#139  -  []  114.76 46.47 90 top
NOREF#140  -  []  41.27 9.8 90 top
NOREF#141  -  []  74.47 64.11 90 top
NOREF#142  -  []  73.13 2.13 0 top
NOREF#143  -  []  14.03 1.75 90 top
NOREF#144  -  []  47.47 98.52 90 top
NOREF#145  -  []  23.5 27.5 90 top
NOREF#146  -  []  114.76 41.57 90 top
NOREF#147  -  []  2.54 0 90 top
NOREF#148  -  []  72.08 11.53 0 top
NOREF#149  -  []  85.21 13.32 90 top
NOREF#150  -  []  8.91 52.22 0 top
NOREF#151  -  []  52 104.79 0 top
NOREF#152  -  []  55.22 69.39 0 top
NOREF#153  -  []  20.92 5.25 90 top
NOREF#154  -  []  56.12 109.3 0 top
NOREF#155  -  []  51.55 26.46 90 top
NOREF#156  -  []  42.13 80.96 90 top
NOREF#157  -  []  0.43 106.83 0 top
NOREF#158  -  []  10.36 73.52 0 top
NOREF#159  -  []  86.71 98.49 90 top
NOREF#160  -  []  0 2.54 0 top
NOREF#161  -  []  21.23 27.23 0 top
NOREF#162  -  []  81.31 33.97 90 top
NOREF#163  -  []  55.1 59.1 90 top
NOREF#164  -  []  42.87 5.27 0 top
NOREF#165  -  []  73.64 18.49 0 top
NOREF#166  -  []  63.08 109.3 0 top
NOREF#167  -  []  26.67 42.98 90 top
NOREF#168  -  []  24.44 10.18 0 top
NOREF#169  -  []  55.1 55.42 90 top
NOREF#170  -  []  42.16 80.17 90 top
NOREF#171  -  []  47.47 98.52 90 top
NOREF#172  -  []  43.52 7.08 0 top
NOREF#173  -  []  11.54 52.45 0 top
NOREF#174  -  []  -419.2 -314.78 0 top
NOREF#175  -  []  29.75 -2.65 90 top
NOREF#176  -  []  49.42 0.3 90 top
NOREF#177  -  []  36.77 1.17 90 top
NOREF#178  -  []  23.46 43.25 0 top
NOREF#179  -  []  20.92 5.25 90 top
NOREF#180  -  []  58.5 106.15 90 top
NOREF#181  -  []  56.25 29.38 90 top
NOREF#182  -  []  49.66 21.8 90 top
NOREF#183  -  []  7.7 13.9 90 top
NOREF#184  -  []  41.07 13.37 0 top
NOREF#185  -  []  64.66 107.73 90 top
NOREF#186  -  []  40.86 10.41 0 top
NOREF#187  -  []  57.49 58.51 0 top
NOREF#188  -  [unnamed#2]  3.68 102.74 0 top
NOREF#189  -  []  51.55 106.15 90 top
NOREF#190  -  []  10.68 7.35 90 top
NOREF#191  -  []  32.8 0.28 90 top
NOREF#192  -  []  7.63 4.25 0 top
NOREF#193  -  [unnamed#2]  40.75 71.42 315 top
NOREF#194  -  []  20.15 1.15 0 top
NOREF#195  -  []  47.74 26.29 0 top
NOREF#196  -  []  24.23 10.39 90 top
NOREF#197  -  []  81.96 47.77 0 top
NOREF#198  -  []  38.87 5.27 0 top
NOREF#199  -  []  52 104.79 90 top
NOREF#200  -  []  26.16 96.52 90 top
NOREF#201  -  []  23.86 101.47 0 top
NOREF#202  -  []  13.36 73.82 90 top
NOREF#203  -  []  12.69 7.44 0 top
NOREF#204  -  []  23.79 12.3 0 top
NOREF#205  -  []  7.7 19.4 0 top
NOREF#206  -  []  81.31 14.97 90 top
NOREF#207  -  []  37.55 5.27 90 top
NOREF#208  -  []  2.54 0 0 top
NOREF#209  -  []  14.03 4.25 90 top
NOREF#210  -  []  69.41 54.69 0 top
NOREF#211  -  []  73.47 61.84 90 top
NOREF#212  -  []  60.53 52.07 90 top
NOREF#213  -  []  36.17 -2.63 0 top
NOREF#214  -  []  58.95 104.79 90 top
NOREF#215  -  []  44.68 16.68 0 top
NOREF#216  -  []  11.09 7.96 90 top
NOREF#217  -  []  20.96 80.14 0 top
NOREF#218  -  []  58.5 106.15 90 top
NOREF#219  -  []  26.9 7.06 0 top
NOREF#220  -  []  65.51 93.18 0 top
NOREF#221  -  []  36.77 1.17 0 top
NOREF#222  -  []  26.16 94.49 90 top
NOREF#223  -  []  12.83 3.9 90 top
NOREF#224  -  []  61.25 54.69 0 top
NOREF#225  -  []  86.41 103.14 90 top
NOREF#226  -  []  85.08 -6.82 90 top
NOREF#227  -  []  67.93 106.9 90 top
NOREF#228  -  []  64.31 93.78 0 top
NOREF#229  -  []  26.25 5.25 0 top
NOREF#230  -  []  59.62 89.43 0 top
NOREF#231  -  []  31.75 29.34 0 top
NOREF#232  -  []  43.73 16.58 0 top
NOREF#233  -  []  57.49 58.51 90 top
NOREF#234  -  []  29.7 17.11 90 top
NOREF#235  -  []  6.76 4.68 0 top
NOREF#236  -  []  75.47 61.31 90 top
NOREF#237  -  []  45.69 23.17 0 top
NOREF#238  -  []  46.37 -2.63 90 top
NOREF#239  -  [unnamed#2]  40.75 54.7 45 top
NOREF#240  -  []  24.13 42.98 0 top
NOREF#241  -  []  37.55 5.27 90 top
NOREF#242  -  []  64.31 93.78 90 top
NOREF#243  -  []  41.72 12.32 90 top
NOREF#244  -  []  32.87 95.57 0 top
NOREF#245  -  []  43.76 80.14 90 top
NOREF#246  -  []  3.17 3.17 0 top
NOREF#247  -  []  68.68 52.07 90 top
NOREF#248  -  []  51.55 106.15 0 top
NOREF#249  -  []  11.48 4.43 0 top
NOREF#250  -  []  0 2.54 0 top
NOREF#251  -  []  28.05 16.66 0 top
NOREF#252  -  []  29.7 17.11 90 top
NOREF#253  -  []  65.51 93.18 90 top
NOREF#254  -  []  -5.21 -40.53 0 top
NOREF#255  -  []  64.31 103.28 0 top
NOREF#256  -  []  25.26 98.52 90 top
NOREF#257  -  [unnamed#2]  77.19 96.67 0 top
NOREF#258  -  []  73.47 61.84 90 top
NOREF#259  -  []  82.91 98.49 0 top
NOREF#260  -  []  55.47 61.84 0 top
NOREF#261  -  []  38.52 7.08 0 top
NOREF#262  -  []  67.11 103.68 0 top
NOREF#263  -  []  75.47 61.31 0 top
NOREF#264  -  []  63.95 105.6 90 top
NOREF#265  -  []  15.49 7.44 90 top
NOREF#266  -  []  51.55 106.15 90 top
NOREF#267  -  []  9.15 12.45 90 top
NOREF#268  -  []  10.39 26.25 0 top
NOREF#269  -  []  9.01 5.1 0 top
NOREF#270  -  []  9.26 98.52 0 top
NOREF#271  -  []  59.62 37.45 0 top
NOREF#272  -  []  27.1 16.56 0 top
NOREF#273  -  []  58.5 106.15 0 top
NOREF#274  -  []  15.41 13.15 0 top
NOREF#275  -  []  19.55 -2.65 0 top
NOREF#276  -  []  55.1 59.5 0 top
NOREF#277  -  []  46.07 101.47 0 top
NOREF#278  -  []  71.55 18.77 90 top
NOREF#279  -  []  81.97 57.58 90 bottom
NOREF#280  -  []  44.87 79.89 180 bottom
NOREF#281  -  []  37.27 91.77 180 bottom
NOREF#282  -  []  16.36 85.09 180 bottom
NOREF#283  -  []  40.94 27.38 180 bottom
NOREF#284  -  []  43.31 15.88 180 bottom
NOREF#285  -  []  6.98 23.37 180 bottom
NOREF#286  -  [unnamed#2]  80.16 84.48 180 bottom
NOREF#287  -  [unnamed#2]  85.09 8.13 180 bottom
NOREF#288  -  [unnamed#2]  3.68 102.74 180 bottom
Q101  AONR21305C  [DFN3P3X3P3_8L_EX]  9.89 50.8 270 bottom
Q102  NX3008NBKW,115  [SC70_3]  13.97 53.53 180 bottom
Q301  NX3008NBKW,115  [SC70_3]  30 25.18 0 top
Q604  NX3008NBKW,115  [SC70_3]  71.39 85.49 0 bottom
Q903  NX3008NBKW,115  [SC70_3]  19.03 63.58 180 bottom
Q1001  SI2343DS  [SOT-23]  81.52 55.38 180 bottom
Q1002  2N7002  [SOT23_A]  85.27 55.09 90 bottom
Q1003  NX3008NBKW,115  [SC70_3]  83.57 15.92 270 top
R101  1.4M  [RC0603_OV]  13.35 70.29 0 bottom
R102  3.3  [0603_CC]  14.19 75.75 90 bottom
R103  0  [RC1206_OV]  7.43 56.38 0 bottom
R105  43K  [RC0402_25]  8.47 69.52 270 bottom
R107  100K  [0402_CC]  10.2 74.96 180 bottom
R108  100K  [0402_CC]  10.2 76.31 0 bottom
R109  5.6K  [RC0402_25]  7.45 69.52 90 bottom
R110  187K  [0402_CC]  36.8 62.22 180 bottom
R111  41.2K  [RC0402_25]  36.93 60.32 0 bottom
R112  100K  [0402_CC]  32.76 60.57 0 bottom
R113  10K  [0402_CC]  32.76 58.79 0 bottom
R114  1K  [0402_CC]  32.76 59.68 0 bottom
R115  100K  [0402_CC]  34.28 58.79 0 bottom
R120  0  [0805_CC]  6.98 51.69 270 bottom
R125  22K  [0402_CC]  10.54 54.48 0 bottom
R129  4.7K  [0402_CC]  12.17 54.11 90 bottom
R131  1K  [0402_CC]  15.88 51.37 180 bottom
R133  100K  [0402_CC]  14.24 50.48 180 bottom
R134  22K  [0402_CC]  15.88 50.48 180 bottom
R135  499K  [0402_CC]  5.07 81 180 bottom
R136  499  [0402_CC]  6.09 70.92 0 bottom
R137  1.5M  [RC0805_OV]  18.94 60.76 0 bottom
R138  1.2M  [RC0603_OV]  19.04 66.08 0 bottom
R139  118K  [RC0402_25]  19.52 58.71 270 bottom
R140  0  [0402_CC]  18.9 67.59 180 bottom
R201  10K  [0402_CC]  48.49 83.01 270 bottom
R202  10K  [0402_CC]  48.73 72.33 90 bottom
R203  10K  [0402_CC]  50.73 83.02 270 bottom
R204  10K  [0402_CC]  50.9 72.32 90 bottom
R205  10K  [0402_CC]  49.62 83.01 270 bottom
R206  10K  [0402_CC]  49.82 72.33 90 bottom
R207  10K  [0402_CC]  51.81 83.04 270 bottom
R208  10K  [0402_CC]  51.96 72.33 90 bottom
R209  10K  [0402_CC]  66.61 27.37 0 bottom
R210  0  [0402_CC]  52.68 89.82 90 bottom
R211  0  [0402_CC]  68.45 28.26 180 top
R212  0  [0402_CC]  66.47 29.12 0 bottom
R213  0  [0402_CC]  66.47 30.43 0 bottom
R214  10K  [0402_CC]  53.06 72.35 90 bottom
R215  100K  [0402_CC]  66.54 31.81 90 bottom
R216  0  [0402_CC]  43.54 78.82 180 bottom
R217  0  [0402_CC]  38.33 39.67 270 bottom
R218  0  [0402_CC]  63.12 91.85 90 bottom
R219  0  [0402_CC]  39.27 39.7 90 bottom
R301  47K  [0402_CC]  20.07 11.18 90 top
R302  0  [0402_CC]  29.08 14.99 90 top
R303  0  [0402_CC]  28.19 14.99 90 top
R304  1.2M  [0402_CC]  23.14 15.07 90 top
R305  0  [0402_CC]  19.42 24.7 0 bottom
R306  1M  [0402_CC]  20.96 11.18 90 top
R307  1K  [0402_CC]  17.75 14.59 270 top
R308  0  [0402_CC]  19.42 25.58 0 bottom
R309  0  [0402_CC]  45.71 15.01 90 top
R310  0  [0402_CC]  44.82 15.01 90 top
R311  0  [0402_CC]  25.67 45.79 180 bottom
R312  0  [0402_CC]  25.67 44.9 180 bottom
R313  249K  [0402_CC]  22.25 13.07 90 top
R314  249K  [0402_CC]  22.25 15.07 270 top
R315  0  [RC0805_OV]  33.84 25.39 0 bottom
R316  0  [RC0805_OV]  33.84 23.49 0 bottom
R318  1.2M  [0402_CC]  38.67 14.99 90 top
R319  1M  [0402_CC]  37.58 11.2 90 top
R320  1K  [0402_CC]  33.14 13.07 270 top
R321  249K  [0402_CC]  37.58 12.99 90 top
R322  249K  [0402_CC]  37.58 14.99 270 top
R323  0  [RC0805_OV]  11.24 47 180 bottom
R325  0  [RC0805_OV]  11.24 45.09 180 bottom
R327  10K  [0402_CC]  42.66 17.04 90 top
R328  100K  [0402_CC]  22.37 22.67 180 bottom
R329  100K  [0402_CC]  19.42 26.48 0 bottom
R330  100K  [0402_CC]  23.99 47.56 270 bottom
R331  100K  [0402_CC]  25.67 44 180 bottom
R332  0  [0402_CC]  27.28 20.46 90 top
R333  1M  [0402_CC]  28.02 25.11 270 top
R334  0  [0402_CC]  43.55 20.47 90 top
R335  0  [0402_CC]  42.66 20.47 90 top
R336  0  [0402_CC]  26.29 13.21 90 bottom
R337  0  [0402_CC]  26.29 11.67 90 bottom
R338  0  [0402_CC]  42.92 13.23 90 bottom
R339  0  [0402_CC]  42.92 11.69 90 bottom
R340  0  [0402_CC]  31.76 17.91 0 top
R341  0  [0402_CC]  48.38 17.93 0 top
R342  10K  [0402_CC]  26.21 20.43 90 top
R343  1K  [0402_CC]  39.01 21.22 90 top
R344  10K  [0402_CC]  48.96 19.19 270 top
R345  10K  [0402_CC]  32.31 19.19 270 top
R346  10K  [0402_CC]  30.32 22.77 0 top
R349  0  [0402_CC]  24.94 17.04 90 top
R350  0  [0402_CC]  40.72 17.03 90 top
R353  0  [0402_CC]  19.43 23.6 0 bottom
R354  0  [0402_CC]  25.65 46.86 180 bottom
R355  100K  [0402_CC]  48.79 12.17 270 top
R356  174K  [RC0402_25]  34.57 22.01 0 top
R357  24.9K  [RC0402_25]  37.07 22.01 0 top
R358  120K  [RC0402_25]  34.93 16.93 180 top
R359  24.9K  [RC0402_25]  33.95 19.01 90 top
R360  1K  [0402_CC]  41.15 21.21 90 top
R361  47K  [RC0402_25]  48.78 9.86 90 top
R401  0  [0402_CC]  74.6 24.44 180 top
R402  0  [0402_CC]  68.58 23.32 0 top
R403  510  [RC0603_OV]  75.84 15.11 270 top
R404  510  [RC0603_OV]  70.53 15.11 270 top
R405  10K  [0402_CC]  68.58 22.35 180 top
R406  10K  [0402_CC]  68.58 21.37 180 top
R506  10K  [0402_CC]  58.3 30.26 180 top
R508  1.5K  [0402_CC]  52.46 31.78 0 bottom
R510  270  [RC0402_25]  68.16 4.56 90 top
R511  0  [0402_CC]  58.3 31.15 180 top
R512  0  [0402_CC]  55.24 31.75 180 top
R513  270  [RC0402_25]  49.07 7.2 90 top
R514  1M  [1206_CC]  58.72 9.5 270 bottom
R530  0  [0402_CC]  56.52 49.02 0 bottom
R531  0  [0402_CC]  48.77 45.72 0 bottom
R532  0  [0402_CC]  47.51 36.25 0 bottom
R533  0  [0402_CC]  44.08 39.4 0 bottom
R534  0  [0402_CC]  42.81 36.38 180 bottom
R535  0  [0402_CC]  53.21 41.27 90 bottom
R536  0  [0402_CC]  53.34 59.88 270 top
R539  0  [0402_CC]  48.77 47.12 0 bottom
R540  0  [0402_CC]  47.51 37.27 0 bottom
R541  0  [0402_CC]  44.08 40.29 0 bottom
R542  0  [0402_CC]  54.99 49.02 180 bottom
R543  0  [0402_CC]  42.81 37.39 180 bottom
R544  0  [0402_CC]  54.1 41.27 90 bottom
R601  0  [RC0805_OV]  47.96 63.54 270 bottom
R602  0  [RC0805_OV]  47.93 59.35 90 bottom
R603  0  [0402_CC]  75.44 75.95 90 bottom
R604  0  [0402_CC]  74.55 75.95 90 bottom
R610  0  [0402_CC]  67.33 78.27 180 bottom
R611  0  [0402_CC]  67.33 79.16 180 bottom
R612  0  [0402_CC]  71.83 75.95 90 bottom
R613  0  [0402_CC]  70.95 75.95 90 bottom
R614  0  [0402_CC]  65.29 78.27 180 bottom
R615  0  [0402_CC]  65.29 79.16 180 bottom
R616  0  [0402_CC]  67.33 80.27 180 bottom
R617  0  [0402_CC]  67.33 81.16 180 bottom
R618  0  [0402_CC]  67.33 77.34 0 bottom
R619  0  [0402_CC]  67.32 82.04 0 bottom
R620  0  [0402_CC]  71.96 83.35 180 bottom
R621  49.9  [0402_CC]  63.26 78.27 180 bottom
R622  49.9  [0402_CC]  63.26 79.16 180 bottom
R623  10K  [0402_CC]  69.49 86.07 90 bottom
R624  0  [0402_CC]  74.52 78.96 180 bottom
R625  0  [0402_CC]  74.52 78.11 180 bottom
R626  10K  [0402_CC]  60.91 71.7 270 bottom
R627  10K  [0402_CC]  60.02 71.7 270 bottom
R629  0  [0402_CC]  61.47 64.16 90 top
R630  0  [0402_CC]  59.97 64.16 90 top
R631  0  [0402_CC]  58.97 64.16 90 top
R632  0  [0402_CC]  66.15 84.64 0 top
R702  0  [0402_CC]  72.29 90.93 90 bottom
R704  0  [0402_CC]  68.76 90.92 90 bottom
R705  0  [0402_CC]  67.71 90.93 90 bottom
R707  0  [0402_CC]  66.61 90.93 90 bottom
R708  0  [0402_CC]  74.49 90.93 90 bottom
R709  0  [0402_CC]  73.39 90.93 90 bottom
R713  1K  [0402_CC]  2.74 21.26 180 bottom
R714  47  [0402_CC]  71.11 102.57 90 top
R730  2.49K  [RC0402_25]  55.69 24.95 90 bottom
R801  10K  [0402_CC]  16.66 101.45 270 bottom
R802  10K  [0402_CC]  40.87 95.55 90 bottom
R803  10K  [0402_CC]  38 101.45 270 bottom
R804  10K  [0402_CC]  15.78 101.45 270 bottom
R805  10K  [0402_CC]  18.66 95.55 90 bottom
R806  10K  [0402_CC]  38.87 101.45 270 bottom
R807  0  [0402_CC]  39.75 101.45 270 bottom
R808  0  [0402_CC]  17.53 101.45 270 bottom
R809  0  [0402_CC]  40.62 101.45 270 bottom
R810  0  [0402_CC]  18.41 101.45 270 bottom
R811  0  [RC0805_OV]  28.78 90.8 90 bottom
R812  0  [RC0805_OV]  26.42 90.8 90 bottom
R902  1K  [0402_CC]  2.72 12.29 0 bottom
R903  1K  [0402_CC]  2.69 9.88 0 bottom
R904  470  [0402_CC]  5.74 12.87 0 top
R908  0  [0402_CC]  22.5 18.26 0 top
R909  0  [0402_CC]  22.5 19.35 0 top
R910  0  [0402_CC]  22.52 20.44 0 top
R911  0  [0402_CC]  22.53 21.55 0 top
R915  1K  [0402_CC]  2.77 14.86 0 bottom
R916  1K  [0402_CC]  2.74 17.17 0 bottom
R917  10K  [0402_CC]  57.44 100.24 270 top
R918  10K  [0402_CC]  61.25 100.24 270 top
R919  10K  [0402_CC]  58.95 101.6 90 bottom
R920  100  [0402_CC]  55.15 96.94 270 top
R921  0  [0402_CC]  61.25 94.16 270 top
R922  0  [0402_CC]  62.52 94.16 270 top
R923  0  [0402_CC]  64.36 94.01 0 top
R924  4.7K  [0402_CC]  10.46 10.34 90 top
R925  1.5K  [0402_CC]  11.53 10.33 90 top
R926  10K  [0402_CC]  8.36 10.35 90 top
R927  0  [0402_CC]  13.77 10.31 90 top
R928  0  [0402_CC]  8.88 10.62 0 bottom
R929  100K  [0402_CC]  19.23 23.36 270 top
R930  120K  [RC0402_25]  17.39 23.51 270 top
R1001  0  [0805_CC]  84.77 52.17 180 bottom
R1003  0  [0402_CC]  78 21.42 180 bottom
R1004  0  [0402_CC]  78.75 22.49 0 bottom
R1005  0  [0402_CC]  78.64 25.38 180 bottom
R1006  0  [0402_CC]  78.65 26.44 180 bottom
R1009  0  [0402_CC]  78.61 31.99 180 bottom
R1010  0  [0402_CC]  78.61 30.95 180 bottom
R1011  0  [0402_CC]  78.61 29.78 180 bottom
R1012  0  [0402_CC]  78.61 28.66 180 bottom
R1013  0  [0402_CC]  78.61 27.55 180 bottom
R1014  0  [0402_CC]  76.58 28.66 0 bottom
R1015  0  [0402_CC]  76.58 30.95 0 bottom
R1016  0  [0402_CC]  76.58 31.99 0 bottom
R1017  0  [0402_CC]  76.58 27.55 180 bottom
R1018  0  [0402_CC]  76.58 29.78 180 bottom
R1019  0  [0402_CC]  77.88 20.3 180 bottom
R1020  0  [0402_CC]  77.88 19.23 180 bottom
R1021  0  [0402_CC]  77.87 18.19 180 bottom
R1022  0  [0402_CC]  77.86 17.11 180 bottom
R1023  0  [0402_CC]  77.85 16.04 180 bottom
R1024  0  [0402_CC]  77.86 14.97 180 bottom
R1025  0  [0402_CC]  77.86 13.88 180 bottom
R1026  0  [0402_CC]  77.86 12.79 180 bottom
R1027  0  [0402_CC]  77.91 43.38 180 bottom
R1028  0  [0402_CC]  77.9 44.43 180 bottom
R1029  22K  [0402_CC]  80.48 51.66 0 bottom
R1030  47  [0402_CC]  86.84 52.76 90 bottom
R1031  10K  [0402_CC]  82.13 52.73 0 bottom
R1032  1K  [0402_CC]  81.2 15.05 90 top
R1033  10K  [0402_CC]  81.2 16.79 90 top
R1034  0  [0805_CC]  78.54 55.52 90 bottom
R1101  4.7K  [0402_CC]  72.78 50.79 180 bottom
R1102  100K  [0402_CC]  70.69 43.17 0 bottom
R1103  4.7K  [0402_CC]  72.79 53.34 180 bottom
R1104  100K  [0402_CC]  70.7 53.34 0 bottom
R1105  4.7K  [0402_CC]  72.79 52.07 180 bottom
R1106  100K  [0402_CC]  70.7 52.07 0 bottom
R1107  4.7K  [0402_CC]  72.79 49.53 180 bottom
R1108  100K  [0402_CC]  70.7 50.8 0 bottom
R1109  4.7K  [0402_CC]  72.79 48.26 180 bottom
R1110  100K  [0402_CC]  70.7 49.53 0 bottom
R1111  4.7K  [0402_CC]  72.79 46.99 180 bottom
R1112  100K  [0402_CC]  70.7 48.26 0 bottom
R1113  4.7K  [0402_CC]  72.79 45.72 180 bottom
R1114  100K  [0402_CC]  70.7 46.99 0 bottom
R1115  4.7K  [0402_CC]  72.79 44.45 180 bottom
R1116  100K  [0402_CC]  70.7 45.72 0 bottom
R1117  4.7K  [0402_CC]  72.79 43.18 180 bottom
R1118  100K  [0402_CC]  70.7 44.45 0 bottom
R1119  4.7K  [0402_CC]  64.53 53.34 180 bottom
R1120  100K  [0402_CC]  60.54 53.34 0 bottom
R1121  4.7K  [0402_CC]  64.53 52.07 180 bottom
R1122  100K  [0402_CC]  60.54 52.07 0 bottom
R1123  4.7K  [0402_CC]  64.53 50.8 180 bottom
R1124  100K  [0402_CC]  60.54 50.8 0 bottom
R1125  4.7K  [0402_CC]  64.53 49.53 180 bottom
R1126  100K  [0402_CC]  60.54 49.53 0 bottom
R1127  4.7K  [0402_CC]  64.53 48.26 180 bottom
R1128  100K  [0402_CC]  60.54 48.26 0 bottom
R1129  4.7K  [0402_CC]  64.53 46.99 180 bottom
R1130  100K  [0402_CC]  60.54 46.99 0 bottom
R1131  4.7K  [0402_CC]  64.53 45.72 180 bottom
R1132  100K  [0402_CC]  60.54 45.72 0 bottom
R1133  4.7K  [0402_CC]  64.53 44.45 180 bottom
R1134  100K  [0402_CC]  60.54 44.45 0 bottom
R1135  4.7K  [0402_CC]  72.77 41.91 180 bottom
R1136  100K  [0402_CC]  70.69 41.92 0 bottom
R1137  4.7K  [0402_CC]  64.55 43.18 180 bottom
R1138  4.7K  [0402_CC]  64.53 41.91 180 bottom
R1139  100K  [0402_CC]  60.55 43.18 0 bottom
R1140  100K  [0402_CC]  60.53 41.88 0 bottom
R1141  10K  [0402_CC]  50.35 21.49 0 top
R1142  10K  [0402_CC]  53.02 24.95 270 bottom
R1143  10K  [0402_CC]  53.4 22.92 180 bottom
R1144  10K  [0402_CC]  52.13 23.3 270 bottom
R1145  10K  [0402_CC]  50.35 23.27 0 top
R1146  10K  [0402_CC]  46.24 24.41 180 top
R1147  4.7K  [RC0402_25]  46.87 33.43 90 bottom
R1148  4.7K  [RC0402_25]  49.79 43.97 180 bottom
R1149  4.7K  [RC0402_25]  51.69 40.64 0 bottom
R1150  4.7K  [RC0402_25]  57.53 44.45 0 bottom
R1151  4.7K  [RC0402_25]  44.58 35.31 180 bottom
R1152  4.7K  [RC0402_25]  44.7 36.2 180 bottom
R1153  4.7K  [RC0402_25]  47.76 33.43 270 bottom
R1154  4.7K  [RC0402_25]  49.79 43.08 0 bottom
R1155  4.7K  [RC0402_25]  51.69 41.53 180 bottom
R1156  4.7K  [RC0402_25]  57.53 45.34 180 bottom
R1157  4.7K  [RC0402_25]  44.07 33.91 270 bottom
R1158  4.7K  [RC0402_25]  44.7 37.08 0 bottom
R1159  4.7K  [RC0402_25]  52.59 30.89 0 bottom
R1160  0  [RC0603_OV]  49.59 23.92 270 bottom
R1161  0  [RC0603_OV]  47.81 23.92 270 bottom
SW101  M096H-A020RT21A  [SW6_DPDT_M096H_TH]  83.21 105.64 0 top
SW901  TACT SWTICH  [SW2_3P4_TACT_SM_NSP]  53.7 106.15 180 top
SW902  TACT SWTICH  [SW2_3P4_TACT_SM_NSP]  60.65 106.15 180 top
SW1101  97C10ST  [SW_DIP10_SM]  71.75 47.62 270 top
SW1102  97C10ST  [SW_DIP10_SM]  63.6 47.62 270 top
TP40  -  [TPAD_020]  76.43 25.02 0 top
TP41  -  [TPAD_020]  66.31 23.6 0 top
TP42  -  [TPAD_020]  79.4 25.23 0 top
TP43  -  [TPAD_020]  66.35 22.16 0 top
TP101  TP_35MIL  [TESTPOINT_35MIL]  29.97 31.83 90 top
TP102  TP_35MIL  [TESTPOINT_35MIL]  21.13 29.24 180 top
TP103  TP_35MIL  [TESTPOINT_35MIL]  31.97 61.71 90 bottom
TP104  TP_35MIL  [TESTPOINT_35MIL]  28.17 89.83 0 top
TP105  TP_35MIL  [TESTPOINT_35MIL]  9.55 70.92 0 bottom
TP205  TP_35MIL  [TESTPOINT_35MIL]  33.81 86.92 90 bottom
TP206  TP_35MIL  [TESTPOINT_35MIL]  35.71 86.92 90 bottom
TP207  TP_35MIL  [TESTPOINT_35MIL]  37.62 86.92 90 bottom
TP208  TP_35MIL  [TESTPOINT_35MIL]  39.52 86.92 90 bottom
TP210  TP_35MIL  [TESTPOINT_35MIL]  60.85 66.41 0 top
TP211  TP_35MIL  [TESTPOINT_35MIL]  62.5 66.41 0 top
TP212  TP_35MIL  [TESTPOINT_35MIL]  67.93 66.41 0 top
TP213  TP_35MIL  [TESTPOINT_35MIL]  65.77 66.41 0 top
TP214  -  [TPAD_020]  42.97 47.17 180 bottom
TP215  -  [TPAD_020]  42.39 44.62 180 bottom
TP216  -  [TPAD_020]  39.41 43.68 180 bottom
TP217  -  [TPAD_020]  39.96 45.98 180 bottom
TP218  -  [TPAD_020]  41.37 46.84 180 bottom
TP219  -  [TPAD_020]  40.46 42.6 180 bottom
TP220  -  [TPAD_020]  42.04 42.38 180 bottom
TP221  -  [TPAD_020]  63.06 87.4 180 bottom
TP222  -  [TPAD_020]  61.11 86.79 180 bottom
TP301  TP_35MIL  [TESTPOINT_35MIL]  38.99 78.82 180 bottom
TP302  TP_35MIL  [TESTPOINT_35MIL]  42.54 76.83 180 bottom
TP303  -  [TPAD_020]  30.43 21.21 0 top
TP304  -  [TPAD_020]  28.85 21.21 0 top
TP305  TP_35MIL  [TESTPOINT_35MIL]  30.99 16.76 0 top
TP306  -  [TPAD_020]  47.01 21.28 0 top
TP307  -  [TPAD_020]  45.48 21.23 0 top
TP308  TP_35MIL  [TESTPOINT_35MIL]  47.62 16.78 0 top
TP309  -  [TPAD_020]  23.88 14.73 90 bottom
TP310  -  [TPAD_020]  40.5 14.75 90 bottom
TP311  -  [TPAD_020]  31.22 15.16 0 top
TP312  -  [TPAD_020]  26.37 15.52 0 top
TP313  -  [TPAD_020]  47.14 15.19 0 top
TP314  -  [TPAD_020]  43.05 15.49 0 top
TP315  TP_35MIL  [TESTPOINT_35MIL]  17.15 32.01 0 top
TP502  1 mm  [TESTPOINT_39MIL]  52 22.13 90 top
TP503  TP_35MIL  [TESTPOINT_35MIL]  49.67 33.18 90 top
TP601  -  [TPAD_020]  73.76 71.4 0 bottom
TP602  -  [TPAD_020]  76.39 78.49 180 bottom
TP603  -  [TPAD_020]  73.76 72.83 0 bottom
TP604  -  [TPAD_020]  71.73 58.52 180 bottom
TP605  -  [TPAD_020]  72.24 71.4 0 bottom
TP606  -  [TPAD_020]  71.73 59.94 180 bottom
TP607  -  [TPAD_020]  72.24 72.83 0 bottom
TP608  -  [TPAD_020]  70.2 58.52 180 bottom
TP609  -  [TPAD_020]  70.72 71.4 0 bottom
TP610  -  [TPAD_020]  70.2 59.94 180 bottom
TP611  -  [TPAD_020]  70.72 72.83 0 bottom
TP612  -  [TPAD_020]  69.19 72.83 0 bottom
TP613  -  [TPAD_020]  69.19 71.4 0 bottom
TP614  -  [TPAD_020]  68.47 58.52 180 bottom
TP615  -  [TPAD_020]  67.67 72.83 0 bottom
TP616  -  [TPAD_020]  68.47 59.94 180 bottom
TP617  -  [TPAD_020]  67.67 71.4 0 bottom
TP618  -  [TPAD_020]  66.23 59.94 180 bottom
TP619  -  [TPAD_020]  65.47 58.52 180 bottom
TP620  -  [TPAD_020]  64.7 59.94 180 bottom
TP621  -  [TPAD_020]  60.47 59.94 180 bottom
TP701  -  [TPAD_020]  64.29 91.27 0 bottom
TP702  TP_35MIL  [TESTPOINT_35MIL]  74.89 99.99 0 top
TP703  -  [TPAD_020]  59.61 88.01 180 bottom
TP704  -  [TPAD_020]  69.52 88.42 180 bottom
TP801  -  [TPAD_050]  16.21 95.78 180 bottom
TP802  -  [TPAD_050]  38.84 95.81 180 bottom
TP901  TP_35MIL  [TESTPOINT_35MIL]  51.87 96.52 90 top
TP902  TP_35MIL  [TESTPOINT_35MIL]  20.58 78.41 90 bottom
TP903  TP_35MIL  [TESTPOINT_35MIL]  18.73 75.69 90 bottom
TP904  TP_35MIL  [TESTPOINT_35MIL]  23.88 91.06 180 bottom
TP905  TP_35MIL  [TESTPOINT_35MIL]  22.03 78.37 270 bottom
TP906  TP_35MIL  [TESTPOINT_35MIL]  19.03 78.4 180 bottom
TP907  -  [TPAD_020]  23.92 12.13 180 top
TP908  -  [TPAD_020]  25.34 12.13 180 top
TP909  TP_35MIL  [TESTPOINT_35MIL]  37.46 76.83 180 bottom
TP910  TP_35MIL  [TESTPOINT_35MIL]  14.91 31.42 180 top
TP911  TP_35MIL  [TESTPOINT_35MIL]  16.81 73.28 180 bottom
TP912  TP_35MIL  [TESTPOINT_35MIL]  23.88 89.53 90 bottom
TP913  -  [TPAD_020]  16.18 14 180 bottom
TP914  -  [TPAD_020]  10.67 23.03 270 top
TP915  -  [TPAD_020]  5.52 18.67 0 top
TP1201  TESTLOOP  [TEST_PIN_TP107]  7.25 89.24 0 top
TP1202  TESTLOOP  [TEST_PIN_TP107]  40.4 30.36 0 top
TP1203  TESTLOOP  [TEST_PIN_TP107]  84.39 87.2 270 bottom
TP1204  -  [TPAD_050]  60.63 55.04 180 bottom
TP1205  -  [TPAD_050]  81.21 86.19 0 top
TP1206  -  [TPAD_050]  31.84 45.84 180 bottom
TP1207  -  [TPAD_050]  71.25 27.22 0 top
TP1208  -  [TPAD_050]  70.23 97.76 0 top
TP1209  -  [TPAD_050]  62.41 40.42 180 bottom
TP1210  -  [TPAD_020]  40.26 37.72 0 top
TVS303  ESD5B5.0ST1G  [DIODE2_SOD523]  27.55 10.29 270 top
TVS304  ESD5B5.0ST1G  [DIODE2_SOD523]  23.24 10.16 270 top
TVS307  ESD5B5.0ST1G  [DIODE2_SOD523]  45.03 11.46 270 bottom
TVS308  ESD5B5.0ST1G  [DIODE2_SOD523]  39.99 10.31 270 top
TVS401  ESD5B5.0ST1G  [DIODE2_SOD523]  78.98 15.2 270 top
TVS402  ESD5B5.0ST1G  [DIODE2_SOD523]  73.67 15.2 270 top
TVS701  ESD5B5.0ST1G  [DIODE2_SOD523]  65.5 90.42 90 bottom
TVS702  ESD5B5.0ST1G  [DIODE2_SOD523]  69.98 90.53 90 bottom
TVS901  ESD5B5.0ST1G  [DIODE2_SOD523]  8.76 7.05 270 top
U42  IP4292CZ10-TBR  [XSON10_0P5_1P1X2P6MM]  58.67 21.72 90 top
U101  MP8759GD  [QFN12_0P5_3P1X2P1]  11.81 72.77 0 bottom
U102  MP2147GD  [QFN12_0P5_2X3MM_EP]  33.91 63.5 180 bottom
U201  PCA6416APW  [TSSOP24_0P65_7P9X4P5]  71.27 21.63 180 bottom
U202  74AVC8T245PW  [TSSOP24_65MM]  71.36 30.14 0 bottom
U203  NTS0104PW  [TSSOP14]  49.93 77.45 270 bottom
U204  74AUP1G125GW  [SC70-5]  54.63 89.71 180 bottom
U301  SGM8709YN5G  [SOT-23-5]  20.09 14.07 0 top
U302  NX20P3483UK  [WLCSP42_0P4_2P94X2P54_SMDP]  22.23 26.04 0 bottom
U303  PTN5110  [HX2QFN16_0P4_2P7X2P7]  28.45 17.91 0 top
U304  SGM8709YN5G  [SOT-23-5]  35.42 13.99 0 top
U305  NX20P3483UK  [WLCSP42_0P4_2P94X2P54_SMDP]  22.86 44.45 180 bottom
U306  PTN5110  [HX2QFN16_0P4_2P7X2P7]  45.08 17.93 0 top
U307  PCMF1USB3S  [WLCSP5_0P4_0P82X1P22]  24.64 9.78 0 bottom
U308  NX20P0407  [WLCSP12_0P4_1P3X1P7MM_SMDP]  24.64 12.95 90 bottom
U309  PCMF1USB3S  [WLCSP5_0P4_0P82X1P22]  41.27 9.8 0 bottom
U310  NX20P0407  [WLCSP12_0P4_1P3X1P7MM_SMDP]  41.27 12.97 90 bottom
U311  SGM8709YN5G  [SOT-23-5]  36.3 19.52 180 top
U312  TPS70933DBVR  [SOT23-5]  46.46 11.94 0 top
U401  WM8524CGEDT  [TSSOP16]  74.6 21.05 180 top
U501  RTL8211FDI-CG  [QFN40_0P4_5X5MM]  53.96 27.5 180 top
U502  NC7WV16  [SC70_6LEAD]  50.93 46.23 90 bottom
U503  NC7WV16  [SC70_6LEAD]  46.75 40.29 90 bottom
U504  NC7WV16  [SC70_6LEAD]  49.71 36.51 90 bottom
U505  NC7WV16  [SC70_6LEAD]  40.58 37.11 90 bottom
U506  NC7WV16  [SC70_6LEAD]  56.39 47.24 180 bottom
U507  NC7WV16  [SC70_6LEAD]  53.59 43.43 0 bottom
U601  9FGV0241AKLF  [QFN24_0P5_4X4_EP2P2]  70.83 79.71 180 bottom
U701  IRM-V538M3/TR1  [RCVR_SM_IRM_V5]  71.11 106.02 0 top
U702  ADP191ACBZ-R7  [WLCSP4_0P4_0P8X0P8_SMDP]  59.82 89.63 180 bottom
U901  FT2232D  [LQFP48]  11.9 16.65 90 top
U902  PCMF1USB3S  [WLCSP5_0P4_0P82X1P22]  10.68 7.35 180 top
U903  RT9193  [SOT23-5]  6.25 9.29 180 bottom
U904  NTB0104BQ  [DHVQFN14_3X2P5MM]  19.51 20.17 90 top
U905  IP4292CZ10-TBR  [XSON10_0P5_1P1X2P6MM]  61.85 21.72 90 top
X901  6MHz  [XTAL_4_7P2X5P2]  6.91 17.35 270 bottom
Y501  25MHz  [XTLOSC4_2P5X2MM_SM]  54.68 21.66 0 top
Y601  25MHz  [XTLOSC4_2P5X2MM_SM]  74.83 83.87 0 bottom

## Library data of the parts
BH1201-BH1204 = SPACER
BH1206-BH1209 = MOUNT_HOLE
C101 C103 C309 C326 = CAP_POL: signal model: DEFAULT_CAPACITOR_2.2e+07pF_2_1
C102 C138 C503 C507 C520-C522 C525-C527 = CAP_NP: signal model: DEFAULT_CAPACITOR_220000pF_2_1
C105 C106 C113 C116 C117 C121 C145 C209 C211 C213 C215 C216 C219-C221 C302 C308 C313 C320 C322 C325 C329 C336-C338 C615 C616 C620-C622 C704 C706 C802-C807 C902 C903 C1002 C1003 = CAP_NP: signal model: DEFAULT_CAPACITOR_100000pF_2_1
C107-C109 C119 C120 C142 C210 C212 C214 C217 C218 C702 C703 C707 C708 C1001 = CAP_NP: signal model: DEFAULT_CAPACITOR_2.2e+07pF_2_1
C114 C141 C401 C405 C901 C905 = CAP_NP: signal model: DEFAULT_CAPACITOR_1e+06pF_2_1
C118 C122 C315 C316 C330 C333 C517 = CAP_NP: signal model: DEFAULT_CAPACITOR_1000pF_2_1
C157 = CAP_NP: signal model: DEFAULT_CAPACITOR_1e+08pF_2_1
C159 = CAP_NP: signal model: DEFAULT_CAPACITOR_10000pF_2_1
C160 = CAP_NP: signal model: DEFAULT_CAPACITOR_220.000000pF_2_1
C161 C339 C340 C342-C344 C909-C918 C920 C1004-C1015 = CAP_NP
C201 C202 C205 C207 C603 C605 C608 = CAP_NP: tolerance: 10%; signal model: DEFAULT_CAPACITOR_1e+06pF_2_1
C203 C204 C206 C208 C303 C323 C604 C606 C607 C609 C611 = CAP_NP: tolerance: 10%; signal model: DEFAULT_CAPACITOR_10000pF_2_1
C301 C321 C623 C812 C815 = CAP_NP: signal model: DEFAULT_CAPACITOR_1e+07pF_2_1
C304 C305 = CAP_POL: signal model: DEFAULT_CAPACITOR_1e+08pF_2_1
C311 C327 = MOT_CAP: signal model: DEFAULT_CAPACITOR_4.7e+07pF_2_1
C314 C317 C319 C331 C334 C335 C402 C403 C801 C811 C813 C814 C906 = CAP_NP: signal model: DEFAULT_CAPACITOR_4.7e+06pF_2_1
C318 C332 C404 = CAP_NP: signal model: DEFAULT_CAPACITOR_2.2e+06pF_2_1
C341 = CAP_NP: room: ATLAS-AP
C406 C407 = CAP_NP: signal model: DEFAULT_CAPACITOR_2700pF_2_1
C514-C516 = CAP_NP: signal model: DEFAULT_CAPACITOR_470.000000pF_2_1; room: RGMII_PHY
C518 C519 = CAP_NP: signal model: DEFAULT_CAPACITOR_22.000000pF_2_1; room: RGMII_PHY
C613 C614 = CAP_NP: signal model: DEFAULT_CAPACITOR_18.000000pF_2_1; room: ATLAS-AP
C617 C618 = CAP_NP: signal model: DEFAULT_CAPACITOR_39.000000pF_2_1
